# Altium PCB Probe.PcbDoc (part 2 of 2)
Units mm, origin at the board's own origin, x right, y up, seen from the top; angles counter-clockwise.
Board outline 70 x 20 mm, 4 copper layers (Top, IN1 (GND), IN2, Bottom Layer), stack 1.587 mm thick; 69 components, 36 nets, 193 pads, 326 vias.
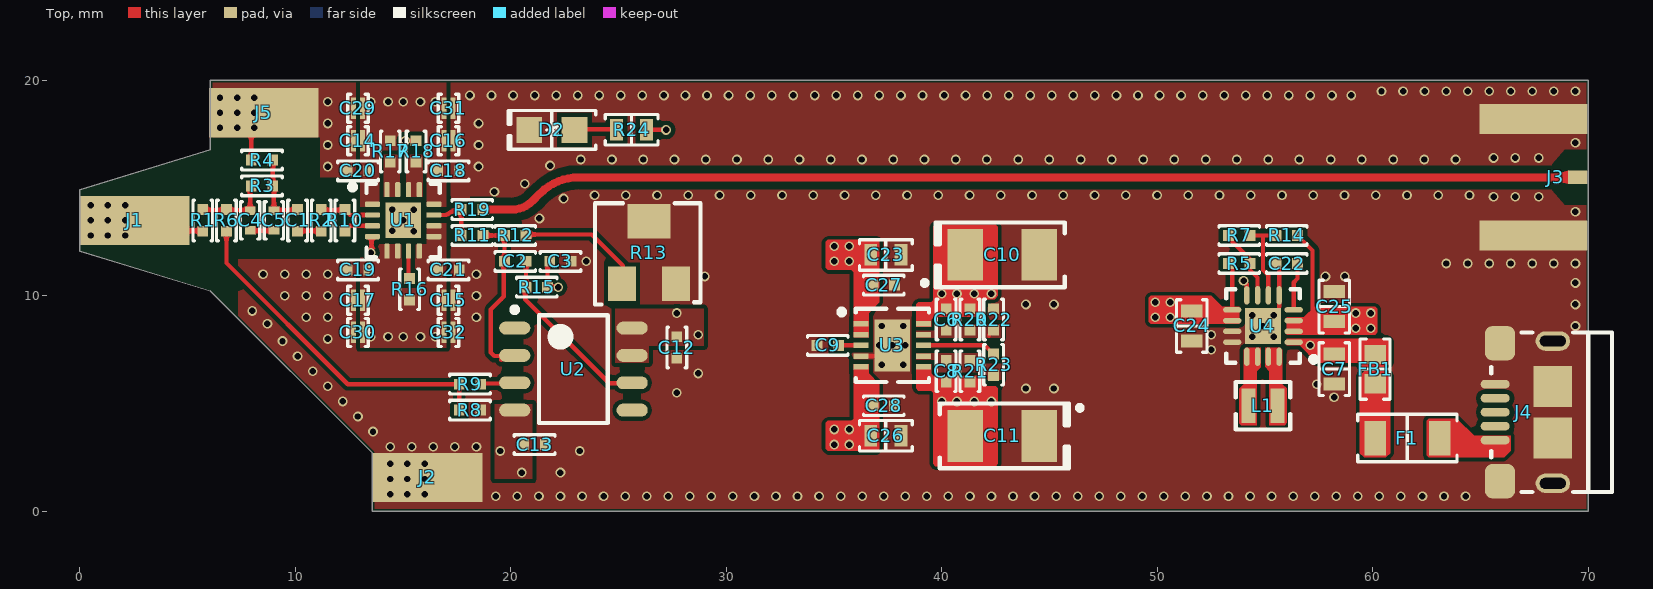
[diagram p0: Top view]

## Silkscreen, mask and mechanical layers (free items; w line width, h text height) (continued)
Board Layer Stack Bottom Solder:
  region: 68.5,17.5 70,17.5 70,13.4 68.5,13.4
Mechanical 1:
  the board outline again, w0.1

## Text inside footprints (layer, text, board x,y; h text height)
J3: Notes "PCB End" at 70.65,14.1 h0.8 r90; Notes "PCB Thickness 1.6mm" at 80.15,11.9 h0.8 r90